# Altium PCB CAL JIG.PcbDoc
Units mm, origin at the board's own origin, x right, y up, seen from the top; angles counter-clockwise.
Board outline 150 x 110 mm, 2 copper layers (Top Layer, Bottom Layer); 10 components, 12 nets, 20 pads, 0 vias.
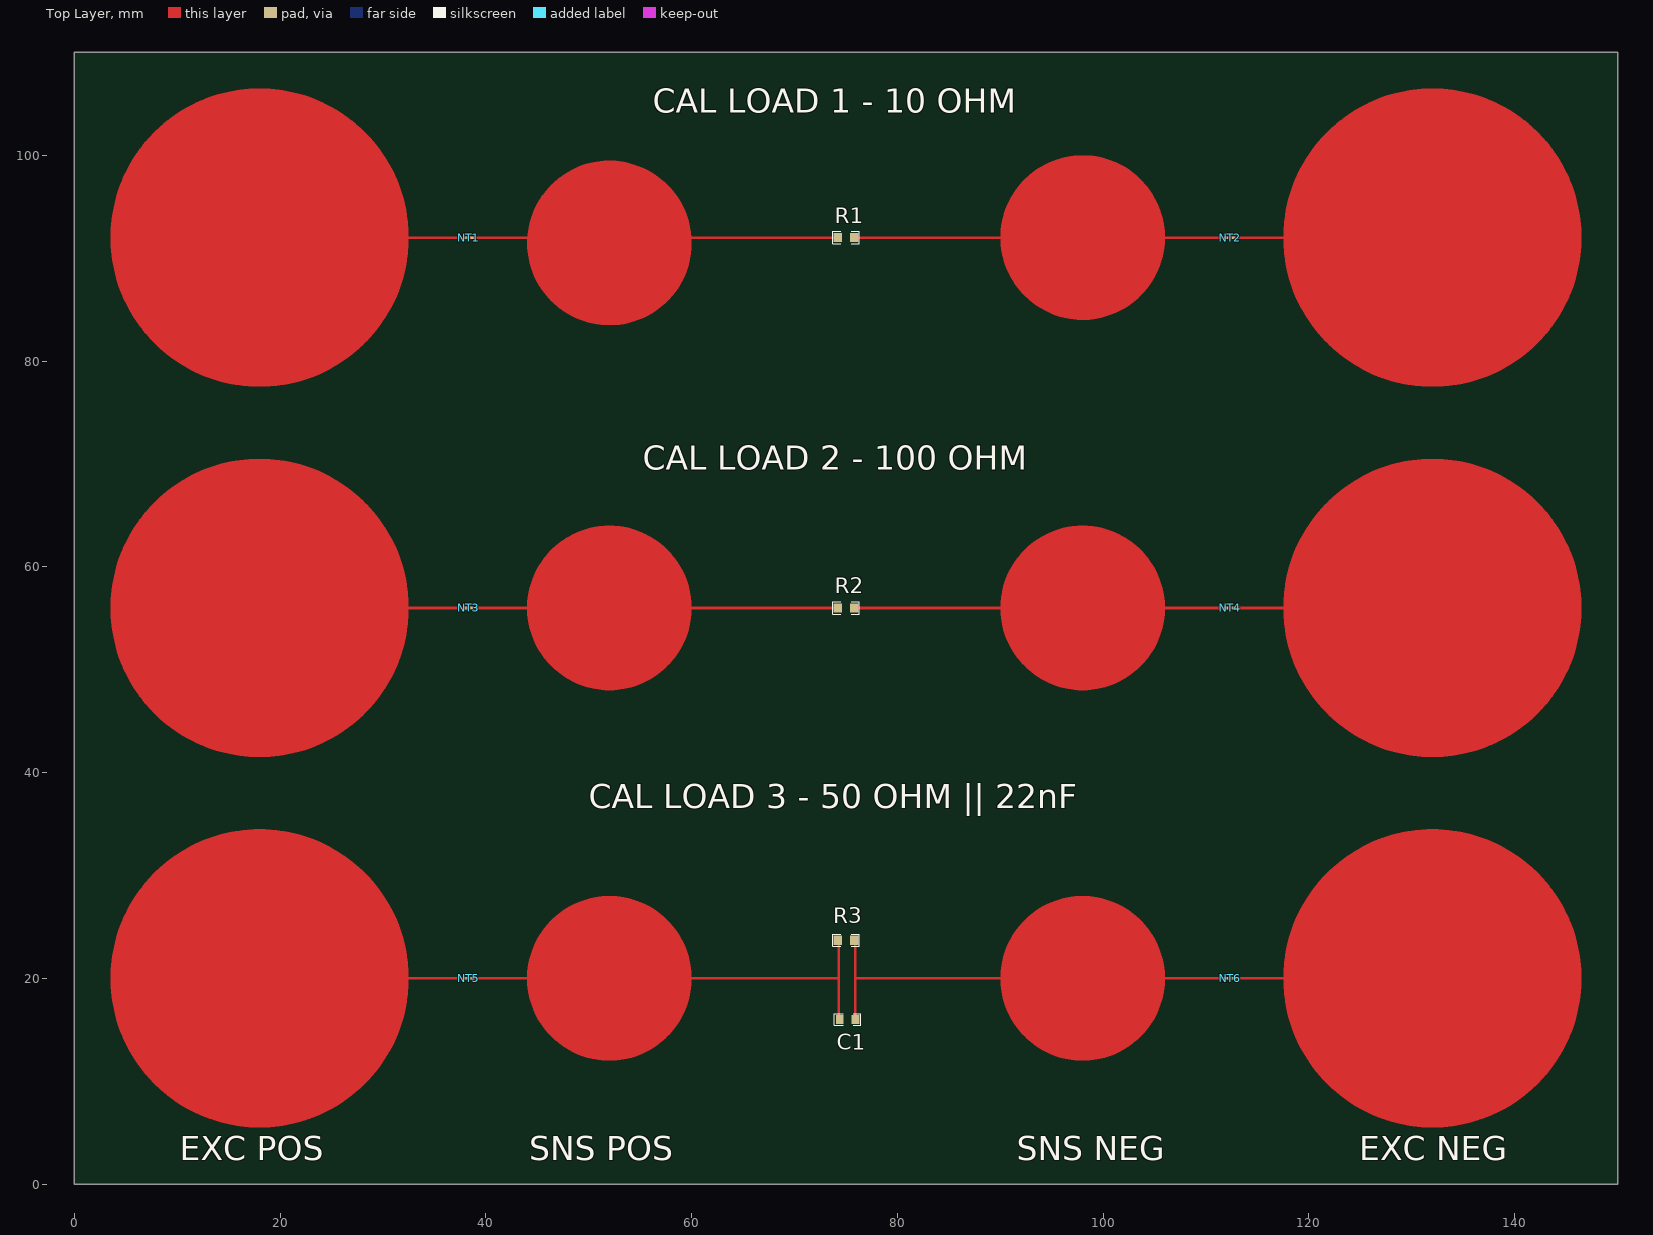
[diagram p0: Top Layer view]
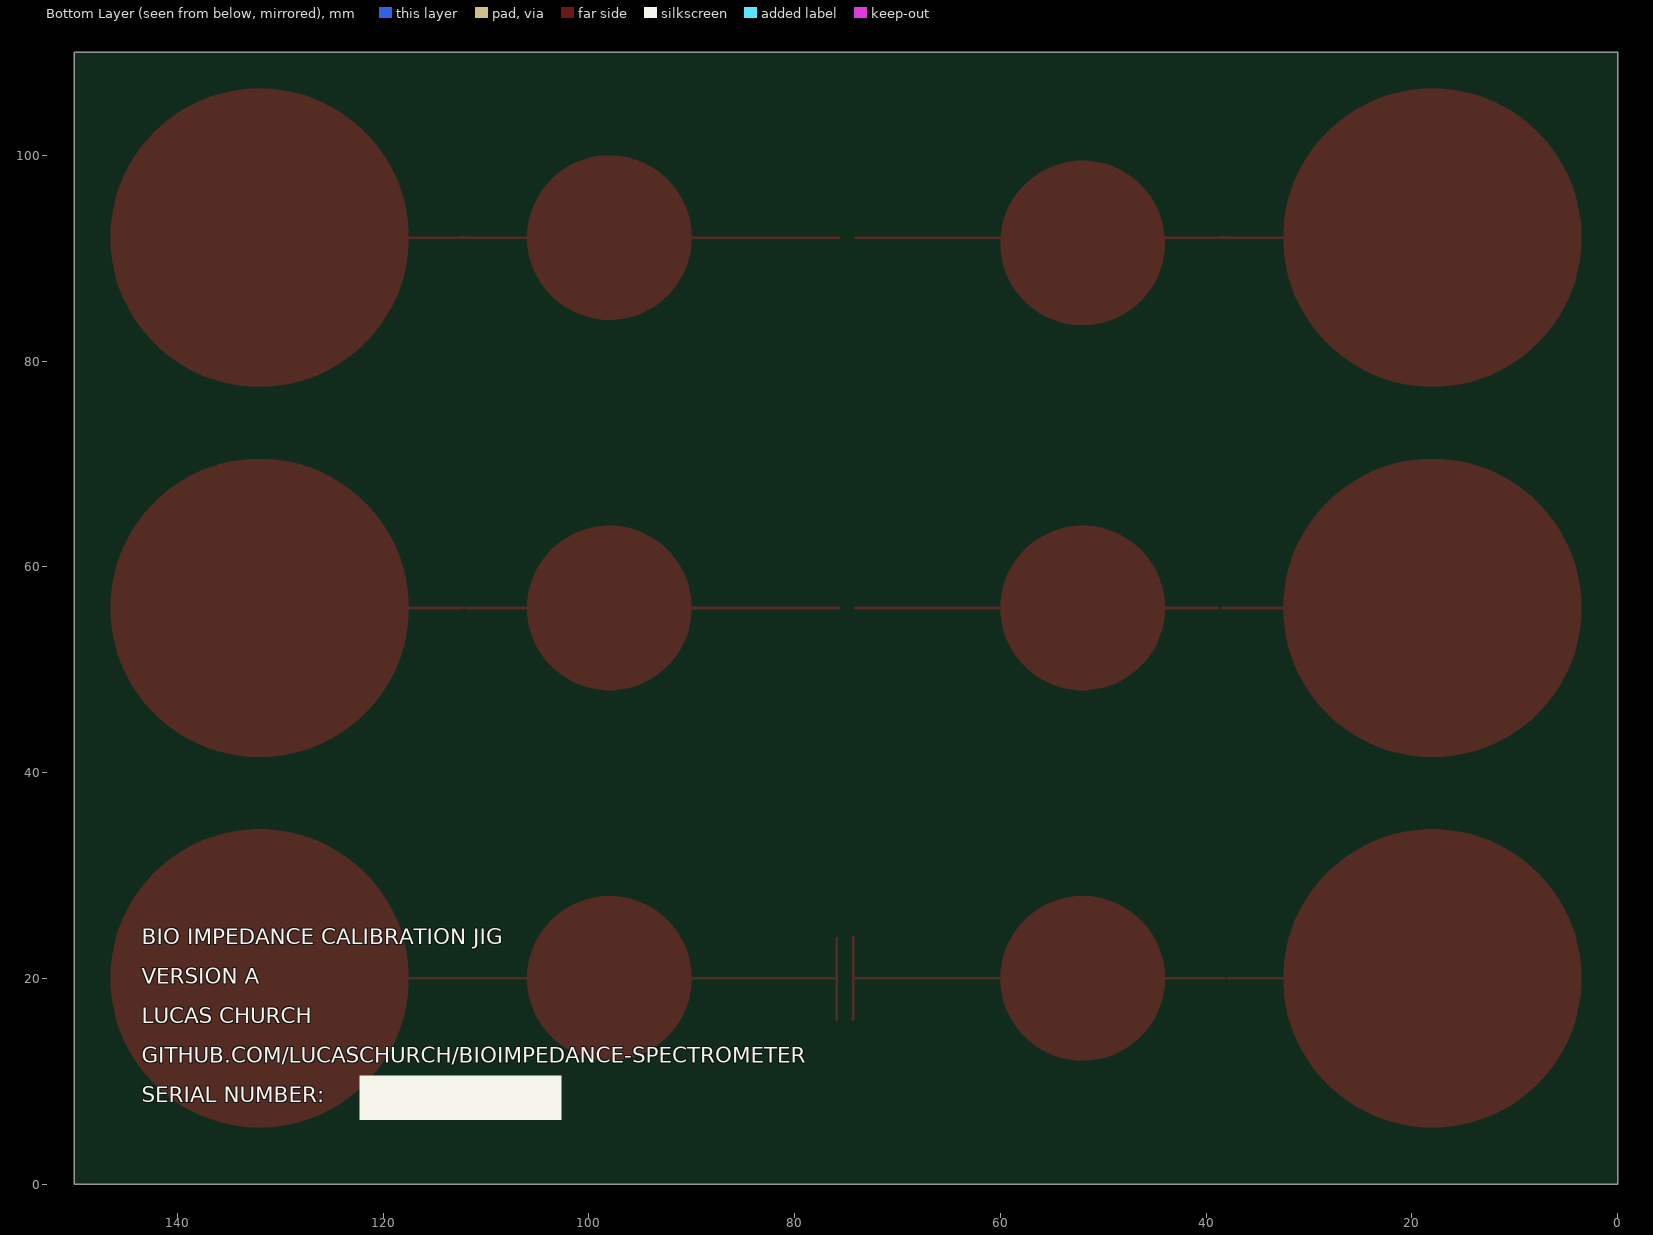
[diagram p1: Bottom Layer view, seen from below]

## Layer stack, top to bottom
Top Solder: solder mask 0.0102, Solder Resist, Dk 3.5
Top Layer: signal copper 0.0356
Dielectric 1: dielectric 0.32, FR-4, Dk 4.8
Bottom Layer: signal copper 0.0356
Bottom Solder: solder mask 0.0102, Solder Resist, Dk 3.5

## Board outline
0,0 150,0 150,110 0,110

## Design rules (kind name [scope] priority, off if disabled: settings)
Clearance [All] p1: gap=0.254 ignorepadtopadclearanceinfootprint=FALSE
PolygonConnect [All] p1: connectstyle=Relief reliefconductorwidth=0.254 reliefentries=4 polygonreliefangle="90 Angle" airgapwidth=0.254
RoutingVias [All] p1: holewidth=0.711 width=1.27 viastyle="Through Hole" minholewidth=0.711 minwidth=1.27 maxholewidth=0.711 maxwidth=1.27
SolderMaskExpansion [All] p1: expansion=0.102 istentingtop=FALSE
Width [All] p1: maxlimit=0.254 minlimit=0.254 preferedwidth=0.254
30 further rules are at their usual default settings.

## Components (designator, comment, footprint, x,y, rotation, side; value= is the part's Value field where it differs from the comment)
C1 "22nF" 0603-CAP 74.4,16 r0 top
NT1 "Net Tie" "Net Tie 10mil" 38,92 r0 top net-tie
NT2 "Net Tie" "Net Tie 10mil" 112,92 r0 top net-tie
NT3 "Net Tie" "Net Tie 10mil" 38,56 r0 top net-tie
NT4 "Net Tie" "Net Tie 10mil" 112,56 r0 top net-tie
NT5 "Net Tie" "Net Tie 10mil" 38,20 r0 top net-tie
NT6 "Net Tie" "Net Tie 10mil" 112,20 r0 top net-tie
R1 "10R" 0603-RES 75,92 r0 top
R2 "100R" 0603-RES 75,56 r0 top
R3 "49.9R" 0603-RES 75,23.698 r0 top

## Footprints (in the part's own frame and the unit in brackets; to place one, negate y for a bottom-side part, rotate by r counter-clockwise, add the part's x,y. Pads: shape width x height; smd on the part's side, far side on the other; paste and mask are expansions set on the pad)
0603-CAP [mil]
  rect 30x33 smd: 1(0,0) 2(60,0)
  silkscreen extent -21,-23 81,23, body extent -1,-16 61,16, height 31
0603-RES [mil]
  rect 32x35 smd: 1(-32,0) 2(32,0)
  silkscreen extent -51,-24 51,24, body extent -34,-18 33,18, height 22
"Net Tie 10mil" [mil] "To connect two nets easily"
  rect 15x10 smd: 1(0,0) 2(27,0)
  Top Layer region: 3.94,-4.95 22,-4.95 22,5.05 3.94,5.05

## Part data
C1: library part CC0603JRNPO9BN471, "CAP CER 470PF 50V NPO 0603", Manufacturer 1=Yageo, Supplier Part Number 1=311-1520-1-ND, Detailed Description="CAP CER 470PF 50V NPO 0603", Manufacturer Part Number 1=CC0603JRNPO9BN471, Price(100)=0.0224, Price(250)=0.01824, Supplier 1=DigiKey, Supplier 2=Mouser, Supplier Part Number 2=603-C0603JRNPO9BN471, Tech#=SMT
NT1 NT2 NT3 NT4 NT5 NT6: "Tying two nets", Detailed Description="Tying two nets"
R1 R2 R3: library part "1K 0603", "RES SMD 1K OHM 1% 1/10W 0603", Manufacturer 1=Panasonic, Manufacturer Part Number 1=ERJ-3EKF1001V, Supplier Part Number 1=P1.00KHCT-ND, Detailed Description="RES SMD 1K OHM 1% 1/10W 0603", Price(100)=0.0129, Supplier 1=DigiKey, Supplier 2=Mouser, Supplier Part Number 2=667-ERJ-3EKF1001V, Tech#=SMT

## Nets (pads, with @x,y where several pads share a name; then routed paths per layer and width w, separated by ;. In a path a pad name is that pad's centre, name@x,y a point inside that pad or via, vN(x,y) a via of type N, cw(c..) or ccw(c..) an arc to the next point about the centre after c; other vN are vias at no path point)
EXC_1_NEG: NT2.2 | length 56.2
  Top Layer w0.254: NT2.2 124.888,92
  Top Layer w15: 139,92 ccw(c132,92) 139,92
EXC_1_POS: NT1.1 | length 56.1
  Top Layer w0.254: 25.852,92 NT1.1
  Top Layer w15: 25,92 ccw(c18,92) 25,92
EXC_2_NEG: NT4.2 | length 55.6
  Top Layer w0.254: NT4.2@112.6,56 124.017,56 ; 124.017,56.8 124.176,56.959
  Top Layer w15: 139,56 ccw(c132,56) 139,56
EXC_2_POS: NT3.1 | length 56.9
  Top Layer w0.254: 25.256,56 38.2,56
  Top Layer w15: 25,56 ccw(c18,56) 25,56
EXC_3_NEG: NT6.2 | length 56.4
  Top Layer w0.254: NT6.2 125,20 125.046,20 ; 125.046,23 125.067,22.979
  Top Layer w15: 125,20 ccw(c132,20) 139,20 ccw(c132,20) 125,20
EXC_3_POS: NT5.1 | length 56.6
  Top Layer w0.254: 25.303,20 NT5.1@37.9,20
  Top Layer w15: 25,20 ccw(c18,20) 25,20
SNS_1_NEG: NT2.1 R1.2 | length 50.1
  Top Layer w0.254: R1.2@75.713,92 95.671,92 ; 101.662,91.953 101.709,92 112.9,92
  Top Layer w10: 101,92 ccw(c98,92) 101,92
SNS_1_POS: NT1.2 R1.1 | length 48.6
  Top Layer w0.254: 38.2,92 48.597,92 ; 54.753,92 R1.1@74.087,92
  Top Layer w10: 55,91.479 ccw(c52,91.479) 55,91.479
SNS_2_NEG: NT4.1 R2.2 | length 56.2
  Top Layer w0.254: R2.2@75.689,56 R2.2 94.793,56 ; 93.7,56 95,56 101,56 NT4.1@111.914,56
  Top Layer w10: 95,56 ccw(c98,56) 101,56 ccw(c98,56) 95,56
SNS_2_POS: NT3.2 R2.1 | length 54.1
  Top Layer w0.254: 38.886,56 49,56 54.857,56 55,56 56.1,56 R2.1@74.087,56
  Top Layer w10: 49,56 ccw(c52,56) 55,56 ccw(c52,56) 49,56
SNS_3_NEG: C1.2 NT6.1 R3.2 | length 63.4
  Top Layer w0.254: R3.2@75.9,23.883 75.9,20 ; C1.2 75.9,16.024 75.9,20 ; 112.567,20 112.013,20 NT6.1 101.662,20 101.3,20 101,20 95.662,20 95,20 75.9,20
  Top Layer w10: 95,20 ccw(c98,20) 101,20 ccw(c98,20) 95,20
SNS_3_POS: C1.1 NT5.2 R3.1 | length 62.6
  Top Layer w0.254: NT5.2@38.586,20 NT5.2 49,20 54.532,20 55,20 56.1,20 74.3,20 ; R3.1@74.3,23.982 74.3,20 ; C1.1 74.3,16.1 74.3,20
  Top Layer w10: 49,20 ccw(c52,20) 55,20 ccw(c52,20) 49,20

## Silkscreen, mask and mechanical layers (free items; w line width, h text height)
Top Overlay:
  text "CAL LOAD 1 - 10 OHM" at 56.226,103.347 h4
  text "CAL LOAD 2 - 100 OHM" at 55.231,68.647 h4
  text "CAL LOAD 3 - 50 OHM || 22nF" at 50.008,35.755 h4
  text "EXC POS" at 10.261,1.547 h4
  text "SNS POS" at 44.193,1.547 h4
  text "SNS NEG" at 91.6,1.547 h4
  text "EXC NEG" at 124.9,1.547 h4
Bottom Overlay:
  rectangle: 102.65,6.25 122.3,10.55
  text "BIO IMPEDANCE CALIBRATION JIG" at 143.446,23.304 h1.52
  text "VERSION A" at 143.446,19.466 h1.52
  text "LUCAS CHURCH" at 143.446,15.629 h1.52
  text "GITHUB.COM/LUCASCHURCH/BIOIMPEDANCE-SPECTROMETER" at 143.446,11.792 h1.52
  text "SERIAL NUMBER:" at 143.446,7.954 h1.52

## Dimensions
0,0 to 0,110 on Mechanical 1
0,110 to 150,110 on Mechanical 1